# Altium PCB 2015_Rx24Duplicator.PcbDoc
Units mil, origin at the board's own origin, x right, y up, seen from the top; angles counter-clockwise.
Board outline 1181.1 x 1968.5 mil, 4 copper layers (1-TOP, 2-SIGNAL, 3-GND, 4-BOT), stack 68 mil thick; 18 components, 5 nets, 54 pads, 0 vias.
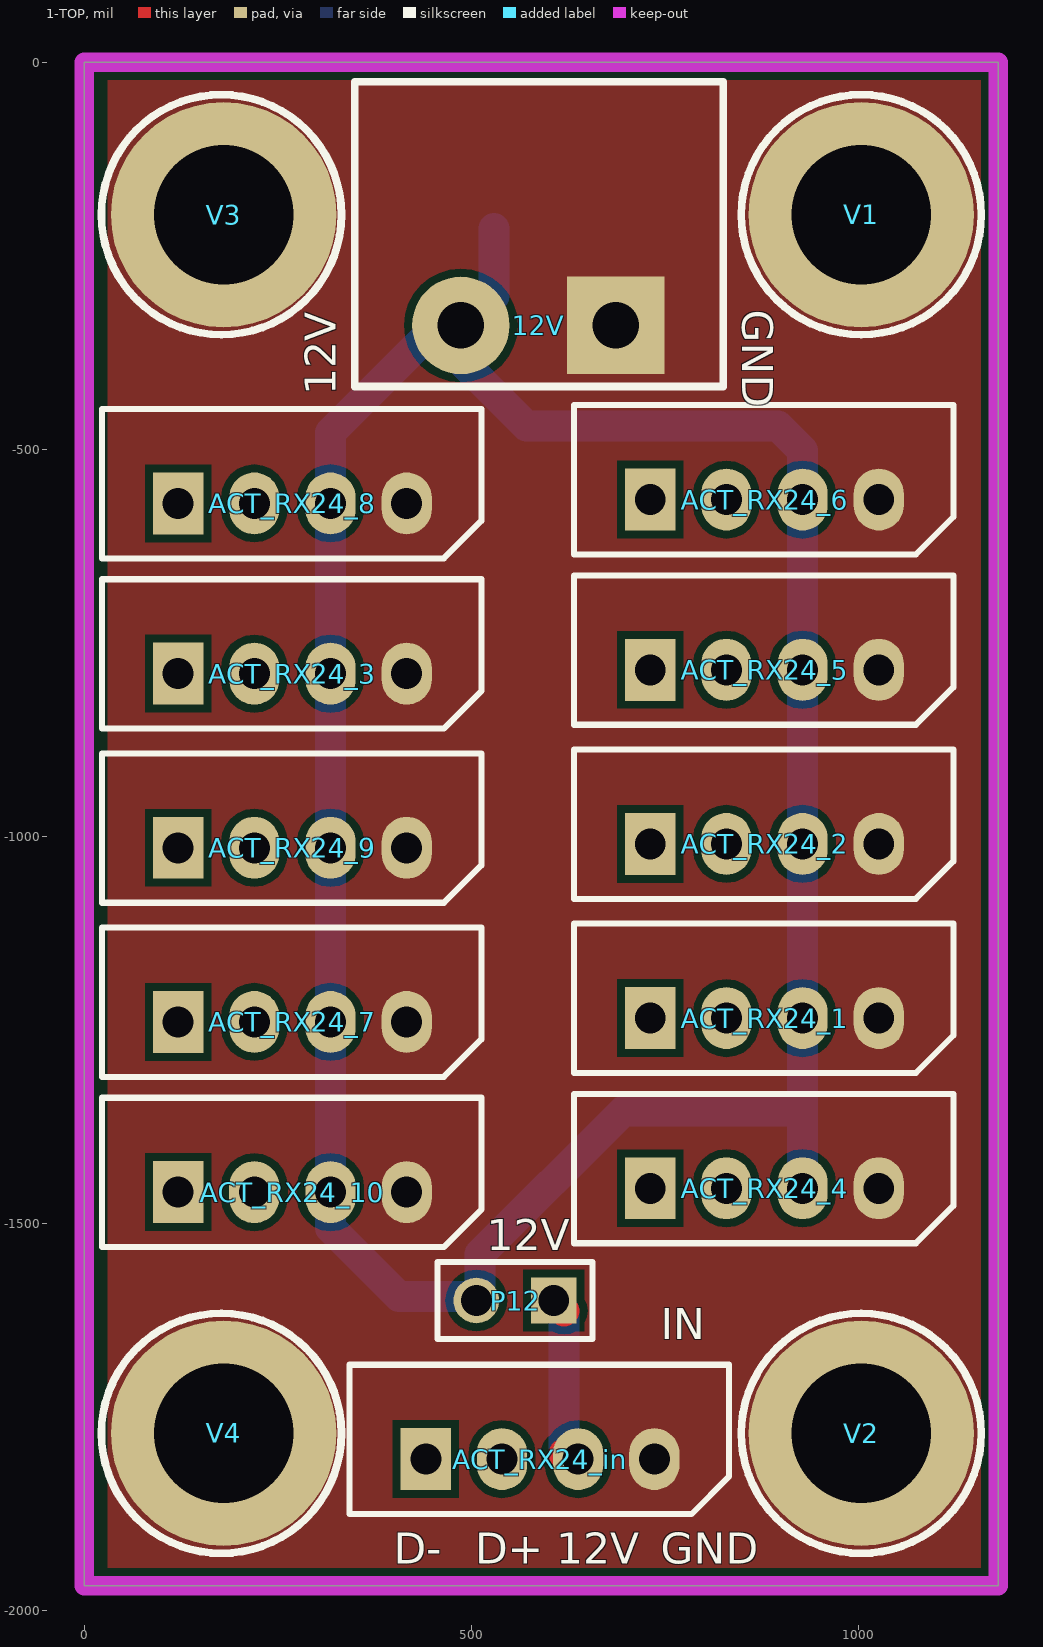
[diagram p0: 1-TOP view]
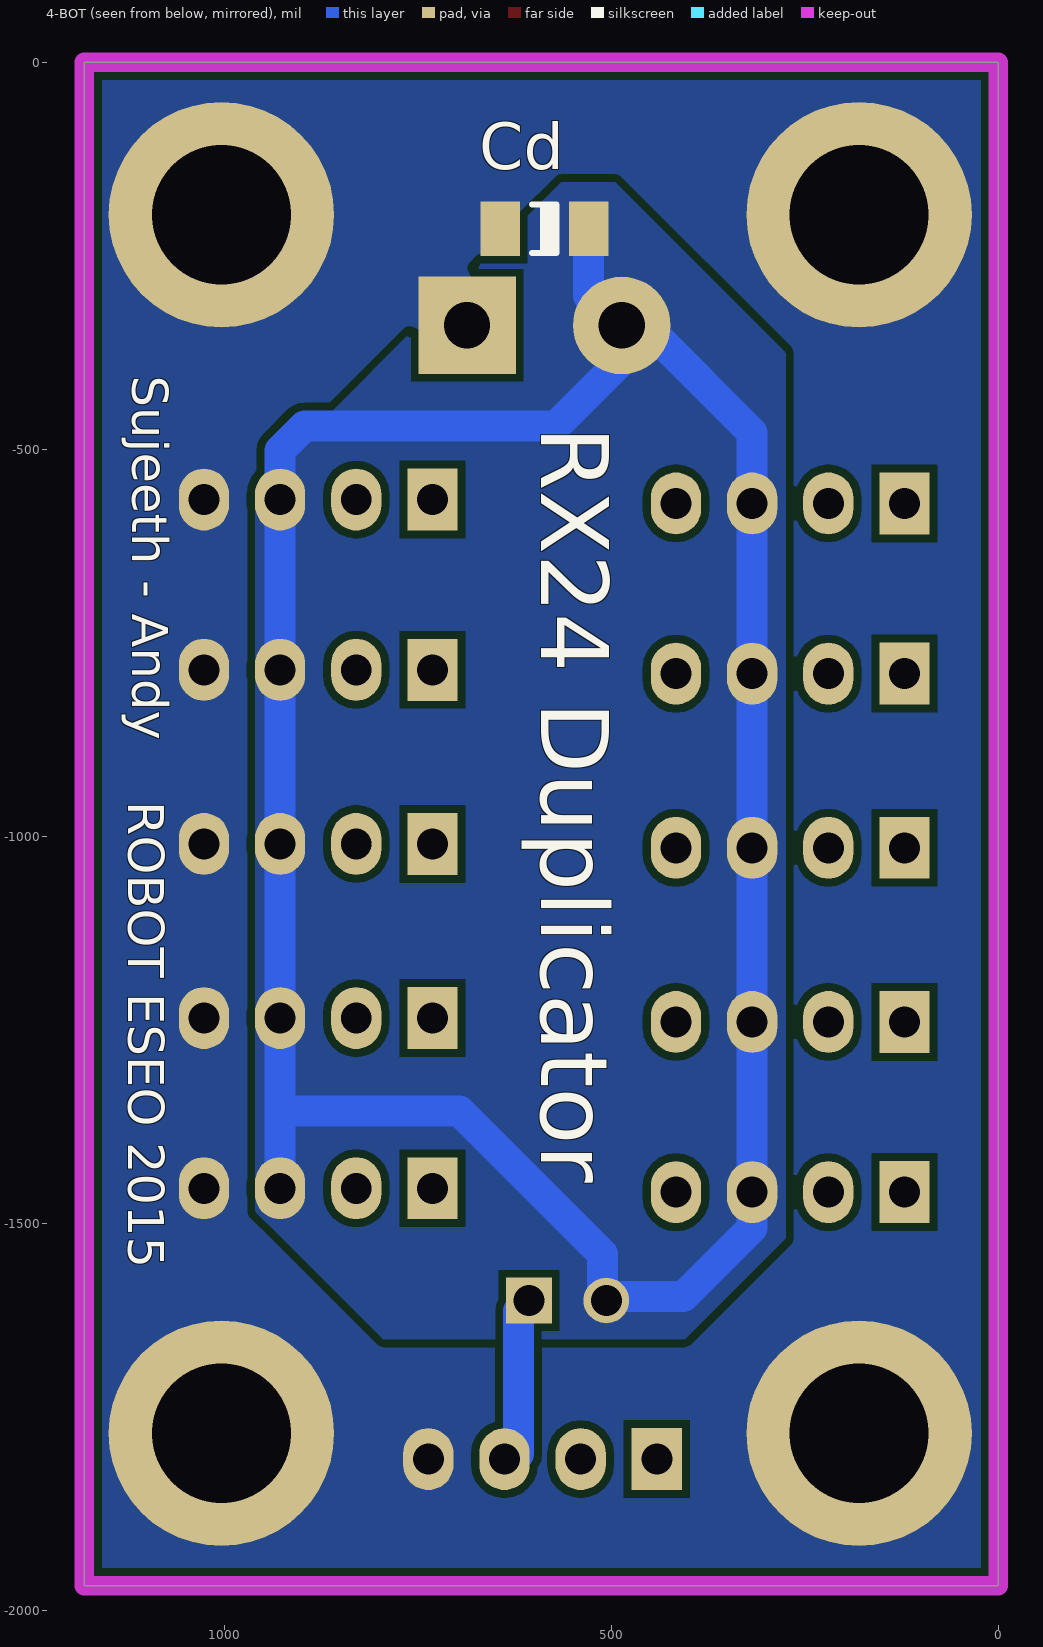
[diagram p1: 4-BOT view, seen from below]
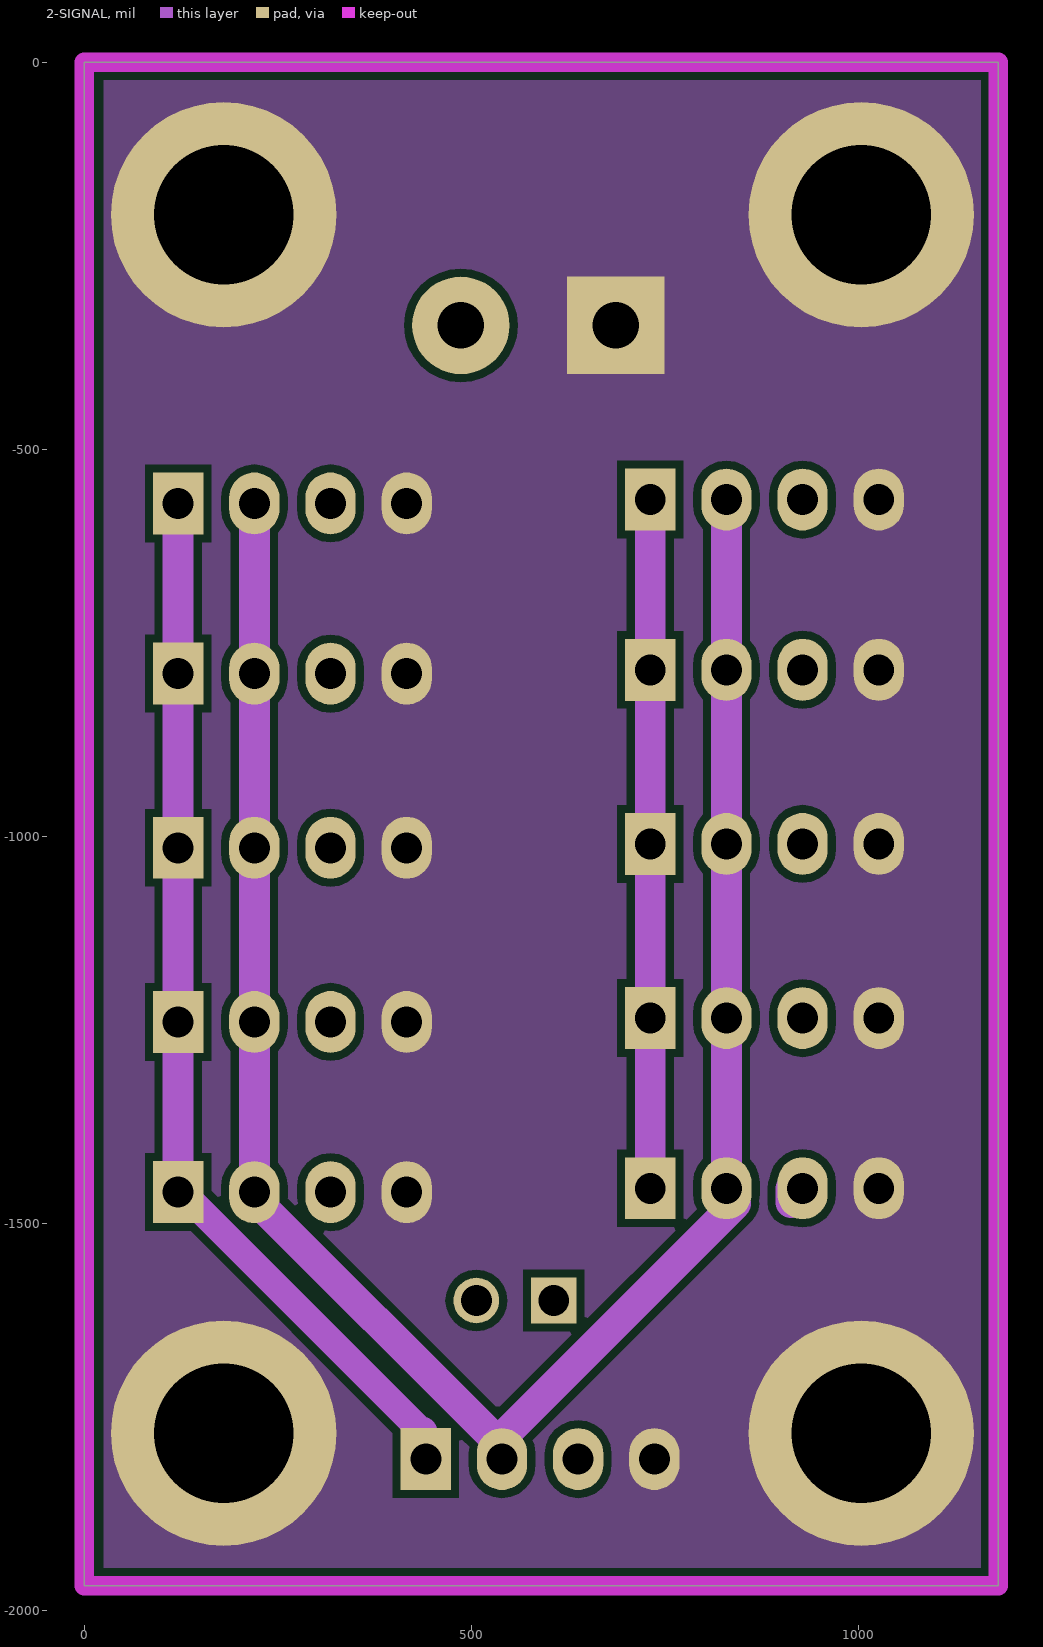
[diagram p2: 2-SIGNAL]
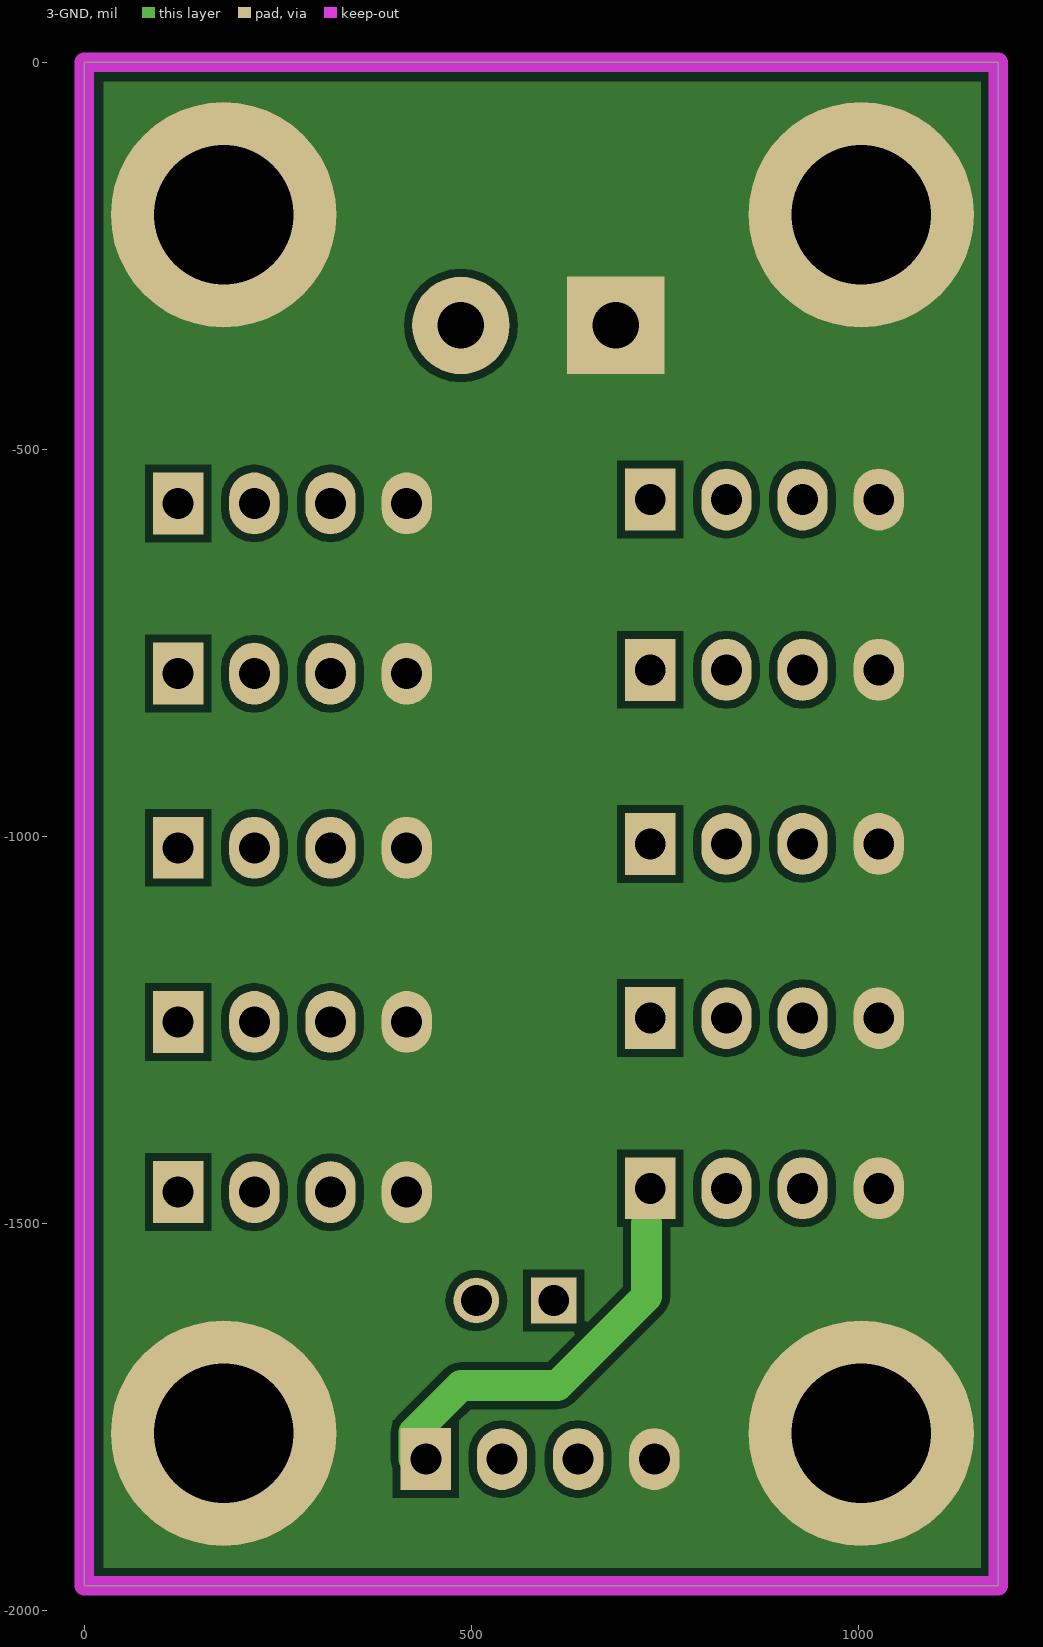
[diagram p3: 3-GND]
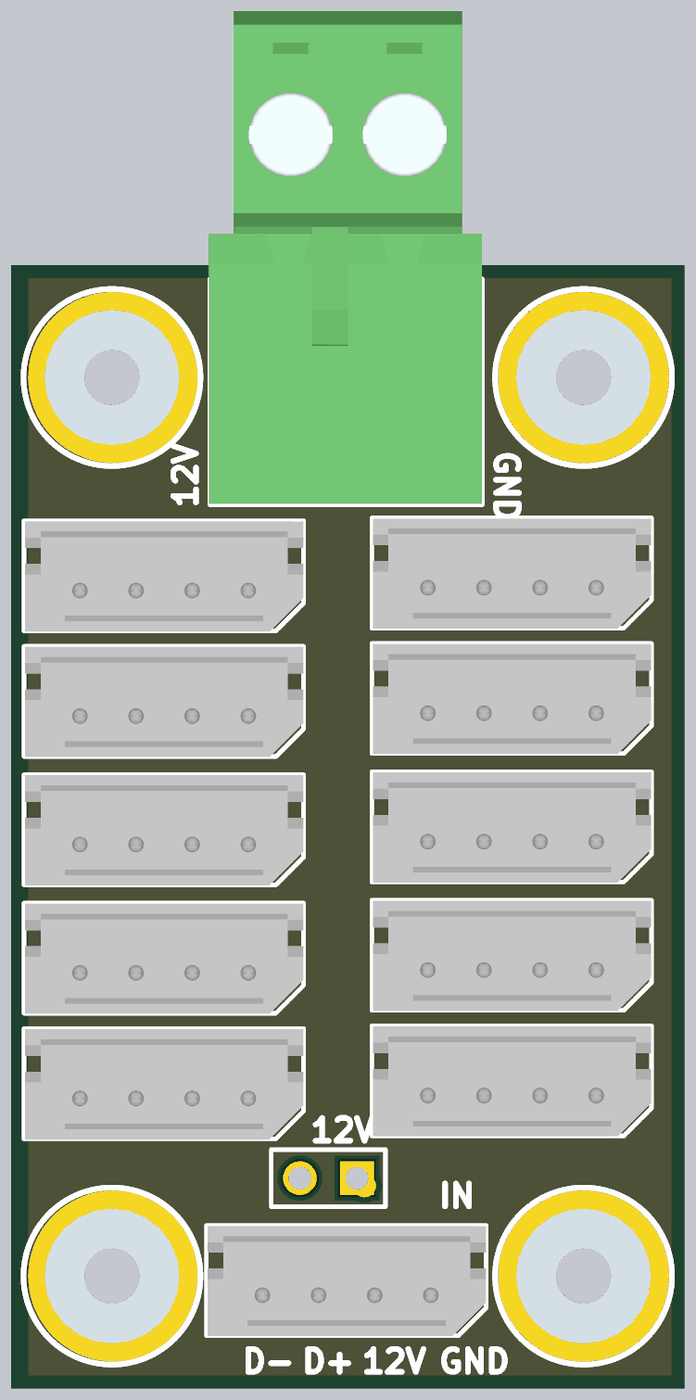
[diagram p4: 3D render of the assembled board from above, using the file's embedded part models]

## Layer stack, top to bottom
Top Solder: solder mask 0.4, Solder Resist, Dk 3.5
1-TOP: signal copper 1.4
Dielectric1: core 20.8, FR-4, Dk 4.8
2-SIGNAL: signal copper 1.4
Dielectric2: prepreg 20.8, FR-4, Dk 4.8
3-GND: signal copper 1.4
Dielectric3: core 20.8, FR-4, Dk 4.8
4-BOT: signal copper 1.4
Bottom Solder: solder mask 0.4, Solder Resist, Dk 3.5

## Board outline
0,-1968.5 0,0 1181.1,0 1181.1,-1968.5

## Design rules (kind name [scope] priority, off if disabled: settings)
Clearance Clearance_1 [InNamedPolygon('2-GND') Or  InNamedPolygon('3-GND') Or  InNamedPolygon('1-GND') Or  InNamedPolygon('4-GND')       Or InNamedPolygon('4-12V')] p1: gap=10
Clearance [All] p2: gap=7
FabricationTestpoint [(IsPad And (OnTopLayer Or OnBottomLayer))] p1: side=3 testpointundercomponent=TRUE minsize=40 maxsize=100 preferedsize=60 minholesize=0 maxholesize=40 preferedholesize=32 testpointgrid=1 allowsidetop=TRUE allowsidebottom=TRUE usegrid=TRUE gridtolerance=0.01
HoleSize [All] p1: absolutevalues=TRUE maxlimit=200 minlimit=1 maxpercent=80.000 minpercent=20.000
PlaneConnect [All] p1: planeconnectstyle=Direct reliefexpansion=20 reliefentries=4 reliefconductorwidth=10 reliefairgap=10
PolygonConnect [All] p1: connectstyle=Direct reliefconductorwidth=10 reliefentries=4 polygonreliefangle="90 Angle" airgapwidth=10
RoomDefinition 2015_Rx24Duplicator [InComponentClass('2015_Rx24Duplicator')] p1: confinementstyle=ConfineIn formatcopy=TRUE lockcomponents=FALSE outline 1306.57,865 1691.57,865 1691.57,205 1306.57,205
RoutingVias [All] p1: holewidth=28 width=50 viastyle="Through Hole" minholewidth=28 minwidth=50 maxholewidth=28 maxwidth=50
SilkToSolderMaskClearance SilkscreenOverComponentPads [IsPad] p1: minsilkscreentomaskgap=10 clearancetoexposedcopper=TRUE
SolderMaskExpansion [All] p1: expansion=4
Width [All] p1: maxlimit=1000 minlimit=10 preferedwidth=20
25 further rules are at their usual default settings.

## Classes and differential pairs
polygon class PolygonClass_1à: 3-GND
polygon class PolygonClass_1: 3-GND

## Components (designator, comment, footprint, x,y, rotation, side; value= is the part's Value field where it differs from the comment)
12V "BARRETTE2" BORNIER2_HORIZ 486.57,-340 r0 top
ACT_RX24_1 "MOLEX 22-03-5045" MOLEX4_2.5MM 1026.57,-1235 r180 top
ACT_RX24_2 "MOLEX 22-03-5045" MOLEX4_2.5MM 1026.57,-1010 r180 top
ACT_RX24_3 "MOLEX 22-03-5045" MOLEX4_2.5MM 416.57,-790 r180 top
ACT_RX24_4 "MOLEX 22-03-5045" MOLEX4_2.5MM 1026.57,-1455 r180 top
ACT_RX24_5 "MOLEX 22-03-5045" MOLEX4_2.5MM 1026.57,-785 r180 top
ACT_RX24_6 "MOLEX 22-03-5045" MOLEX4_2.5MM 1026.57,-565 r180 top
ACT_RX24_7 "MOLEX 22-03-5045" MOLEX4_2.5MM 416.57,-1240 r180 top
ACT_RX24_8 "MOLEX 22-03-5045" MOLEX4_2.5MM 416.57,-570 r180 top
ACT_RX24_9 "MOLEX 22-03-5045" MOLEX4_2.5MM 416.57,-1015 r180 top
ACT_RX24_10 "MOLEX 22-03-5045" MOLEX4_2.5MM 416.57,-1460 r180 top
ACT_RX24_in "MOLEX 22-03-5045" MOLEX4_2.5MM 736.57,-1805 r180 top
Cd "10uF" C1206_N 586.57,-215 r0 bottom
P12 "Jumper SIP 2.54" HDR1X2 606.57,-1600 r180 top
V1 "Entretoise WURTH CMS" ENTRETOISE_CMS#1 1003.94,-196.85 r0 top
V2 "Entretoise WURTH CMS" ENTRETOISE_CMS#1 1003.94,-1771.65 r0 top
V3 "Entretoise WURTH CMS" ENTRETOISE_CMS#2 177.17,-196.85 r0 top
V4 "Entretoise WURTH CMS" ENTRETOISE_CMS#2 177.17,-1771.65 r0 top

## Footprints (in the part's own frame and the unit in brackets; to place one, negate y for a bottom-side part, rotate by r counter-clockwise, add the part's x,y. Pads: shape width x height; smd on the part's side, far side on the other; paste and mask are expansions set on the pad)
BORNIER2_HORIZ [mm] "Connector; Header; 2 Position; screw terminal blocks, Pin Spacing=5.08mm"
  rect 3.2x3.2 hole 1.524: 1(5.08,0)
  round 3.2 hole 1.524: 2(0,0)
  silkscreen extent -3.48,-2.01 8.61,8, body extent -3.54,-1.99 8.62,19.95, height 15.15
C1206_N [mm] "Chip Capacitor, Body 3.2x1.6mm, IPC Medium Density"
  rect 1.3x1.8 smd: 1(-1.45,0) 2(1.45,0)
  silkscreen extent -0.4,-0.8 0.4,0.8, body extent -1.57,-0.81 1.63,0.79, height 1.02
ENTRETOISE_CMS#1 [mm] "Entretoise CMS Wurth trou 4.4mm"
  round 7.4 hole 4.572: 1(0,0)
  silkscreen extent -3.94,-3.94 3.94,3.94, body extent -2.99,-3 2.99,2.98, height 3
ENTRETOISE_CMS#2 [mm] "Entretoise CMS Wurth trou 4.4mm"
  round 7.4 hole 4.572: 1(0.072,0)
  silkscreen extent -3.94,-3.94 3.94,3.94, body extent -2.99,-3 2.99,2.98, height 3
HDR1X2 [mm] "Connector; Header; 2 Position"
  rect 1.5x1.5 hole 1.016: 1(0,0)
  round 1.5 hole 1.016: 2(2.54,0)
  silkscreen extent -1.27,-1.27 3.81,1.27
MOLEX4_2.5MM [mil] "Ref Molex : 22-03-5045 - 4 voies - 2.5mm"
  rect 65x80 hole 40: 1(295.28,0)
  oval 65x80 hole 40: 2(196.85,0) 3(98.43,0) 4(0,0)
  silkscreen extent -96,-122 394,71, body extent -96,-121 392,72, height 233

## Part data
12V: "Header, 2-Pin"
ACT_RX24_1 ACT_RX24_2 ACT_RX24_3 ACT_RX24_4 ACT_RX24_5 ACT_RX24_6 ACT_RX24_7 ACT_RX24_8 ACT_RX24_9 ACT_RX24_10 ACT_RX24_in: library part BARRETTE4, "Header, 4-Pin"
Cd: library part Condensateur, "Capacitor"
P12: library part "Jumper SIP2.54", "Jumper SIP2.54"
V1 V2 V3 V4: "Entretoise Wurth"

## Nets (pads, with @x,y where several pads share a name; then routed paths per layer and width w, separated by ;. In a path a pad name is that pad's centre, name@x,y a point inside that pad or via, vN(x,y) a via of type N, cw(c..) or ccw(c..) an arc to the next point about the centre after c; other vN are vias at no path point)
12V: 12V.2 ACT_RX24_1.3 ACT_RX24_2.3 ACT_RX24_3.3 ACT_RX24_4.3 ACT_RX24_5.3 ACT_RX24_6.3 ACT_RX24_7.3 ACT_RX24_8.3 ACT_RX24_9.3 ACT_RX24_10.3 Cd.1 P12.2 | length 3606.7
  2-SIGNAL w40: ACT_RX24_4.3@913.15,-1473.43 ACT_RX24_4.3@913.15,-1455
  4-BOT w40: ACT_RX24_10.3 318.15,-1506.57 406.57,-1595 511.57,-1595 511.57,-1540 696.57,-1355 928.15,-1355 ; ACT_RX24_10.3@318.15,-1455 ACT_RX24_7.3 ACT_RX24_9.3 ACT_RX24_3.3 ACT_RX24_8.3 318.15,-478.43 12V.2@446.57,-350 ; 12V.2@461.57,-360 571.57,-470 896.57,-470 928.15,-501.57 ACT_RX24_6.3 ACT_RX24_5.3 ACT_RX24_2.3 ACT_RX24_1.3 928.15,-1355 ; 12V.2@501.57,-330 529.49,-302.09 Cd.1 ; ACT_RX24_4.3 928.15,-1355
12VFDP: ACT_RX24_in.3 P12.1 | length 206.2
  1-TOP w40: P12.1 P12.1@620,-1613.43 ; ACT_RX24_in.3@620,-1798.43 ACT_RX24_in.3@621.57,-1800
  4-BOT w40: ACT_RX24_in.3@620,-1798.43 P12.1@620,-1613.43
D+: ACT_RX24_1.2 ACT_RX24_2.2 ACT_RX24_3.2 ACT_RX24_4.2 ACT_RX24_5.2 ACT_RX24_6.2 ACT_RX24_7.2 ACT_RX24_8.2 ACT_RX24_9.2 ACT_RX24_10.2 ACT_RX24_in.2 | length 2684.3
  2-SIGNAL w40: ACT_RX24_10.2@219.72,-1468.15 ACT_RX24_10.2 ACT_RX24_7.2 ACT_RX24_9.2 ACT_RX24_3.2 ACT_RX24_8.2 ; ACT_RX24_10.2@224.72,-1473.15 526.57,-1775 541.57,-1775 ACT_RX24_4.2@841.57,-1475 ; ACT_RX24_4.2@826.57,-1490 ACT_RX24_4.2@826.57,-1460 ; ACT_RX24_4.2 ACT_RX24_1.2 ACT_RX24_2.2 ACT_RX24_5.2 ACT_RX24_6.2
D-: ACT_RX24_1.1 ACT_RX24_2.1 ACT_RX24_3.1 ACT_RX24_4.1 ACT_RX24_5.1 ACT_RX24_6.1 ACT_RX24_7.1 ACT_RX24_8.1 ACT_RX24_9.1 ACT_RX24_10.1 ACT_RX24_in.1 | length 2767.9
  2-SIGNAL w35: ACT_RX24_10.1@121.3,-1454.72 ACT_RX24_in.1@436.57,-1770
  2-SIGNAL w40: ACT_RX24_10.1@121.3,-1454.72 ACT_RX24_7.1 ACT_RX24_9.1 ACT_RX24_3.1 ACT_RX24_8.1 ACT_RX24_8.1@121.3,-560.28 ; ACT_RX24_in.1@436.57,-1795 ACT_RX24_in.1@436.57,-1770 ; ACT_RX24_4.1 ACT_RX24_1.1 ACT_RX24_2.1 ACT_RX24_5.1 ACT_RX24_6.1@731.3,-555
  3-GND w40: ACT_RX24_in.1@426.3,-1805 426.3,-1770.28 486.57,-1710 611.57,-1710 726.57,-1595 726.57,-1500
GND: 12V.1 ACT_RX24_1.4 ACT_RX24_2.4 ACT_RX24_3.4 ACT_RX24_4.4 ACT_RX24_5.4 ACT_RX24_6.4 ACT_RX24_7.4 ACT_RX24_8.4 ACT_RX24_9.4 ACT_RX24_10.4 ACT_RX24_in.4 Cd.2 V1.1 V2.1 V3.1 V4.1

## Polygon pours and split planes (outlines as drawn)
GND on 4-BOT "4-GND" (solid, pour order 1000): 20.04,-20 1175,-20 1175,-1970 20.04,-1970
12V on 4-BOT "4-12V" (solid, pour order 6): 565,-155 960,-550 960,-655 960,-1485 930,-1515 795,-1650 455,-1650 405,-1650 275,-1520 275,-385 275,-375 495,-155
GND on 3-GND "3-GND" (solid, pour order 1001): 25,-25 1180,-25 1180,-1965 25,-1965
GND on 2-SIGNAL "2-GND" (solid, pour order 1002): 25,-17.5 1175,-17.5 1175,-1962.5 25,-1962.5
GND on 1-TOP "1-GND" (solid, pour order 1003): 30,-20 1175,-20 1175,-1970 30,-1970

## Keep-outs
Keep-Out Layer:
  the board outline again, w25

## Silkscreen, mask and mechanical layers (free items; w line width, h text height)
Top Overlay:
  text "GND" at 850,-320 h40 r270
  text "12V" at 325,-430 h40 r90
  text "12V" at 520,-1535 h40
  text "IN" at 745,-1650 h40
  text "D-" at 400,-1940 h40
  text "D+" at 505,-1940 h40
  text "12V" at 610,-1940 h40
  text "GND" at 745,-1940 h40
Bottom Overlay:
  text "Sujeeth - Andy" at 1135,-405 h80 r90
  text "RX24 Duplicator" at 620,-470 h150 r90
  text "ROBOT ESEO 2015" at 1140,-955 h80 r90